# Altium PCB Main.PcbDoc
Units mil, origin at the board's own origin, x right, y up, seen from the top; angles counter-clockwise.
Board outline 2260 x 1190 mil, 4 copper layers (Top Layer, GND 1, GND 2, Bottom Layer), stack 62.449 mil thick; 76 components, 60 nets, 310 pads, 122 vias.
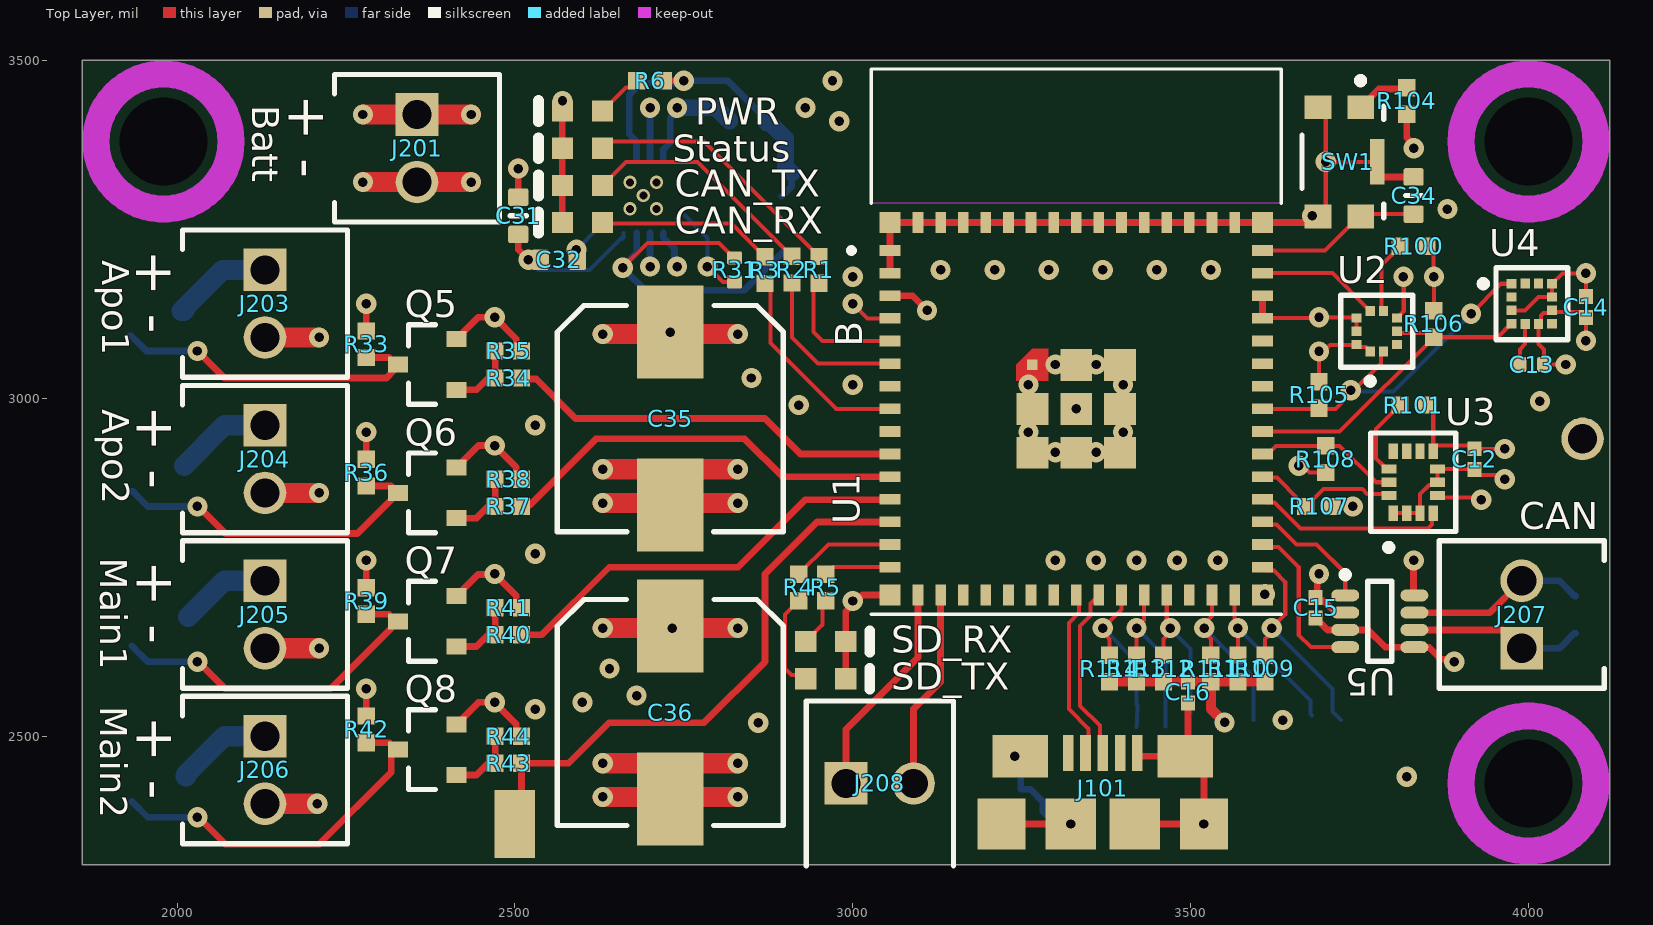
[diagram p0: Top Layer view]
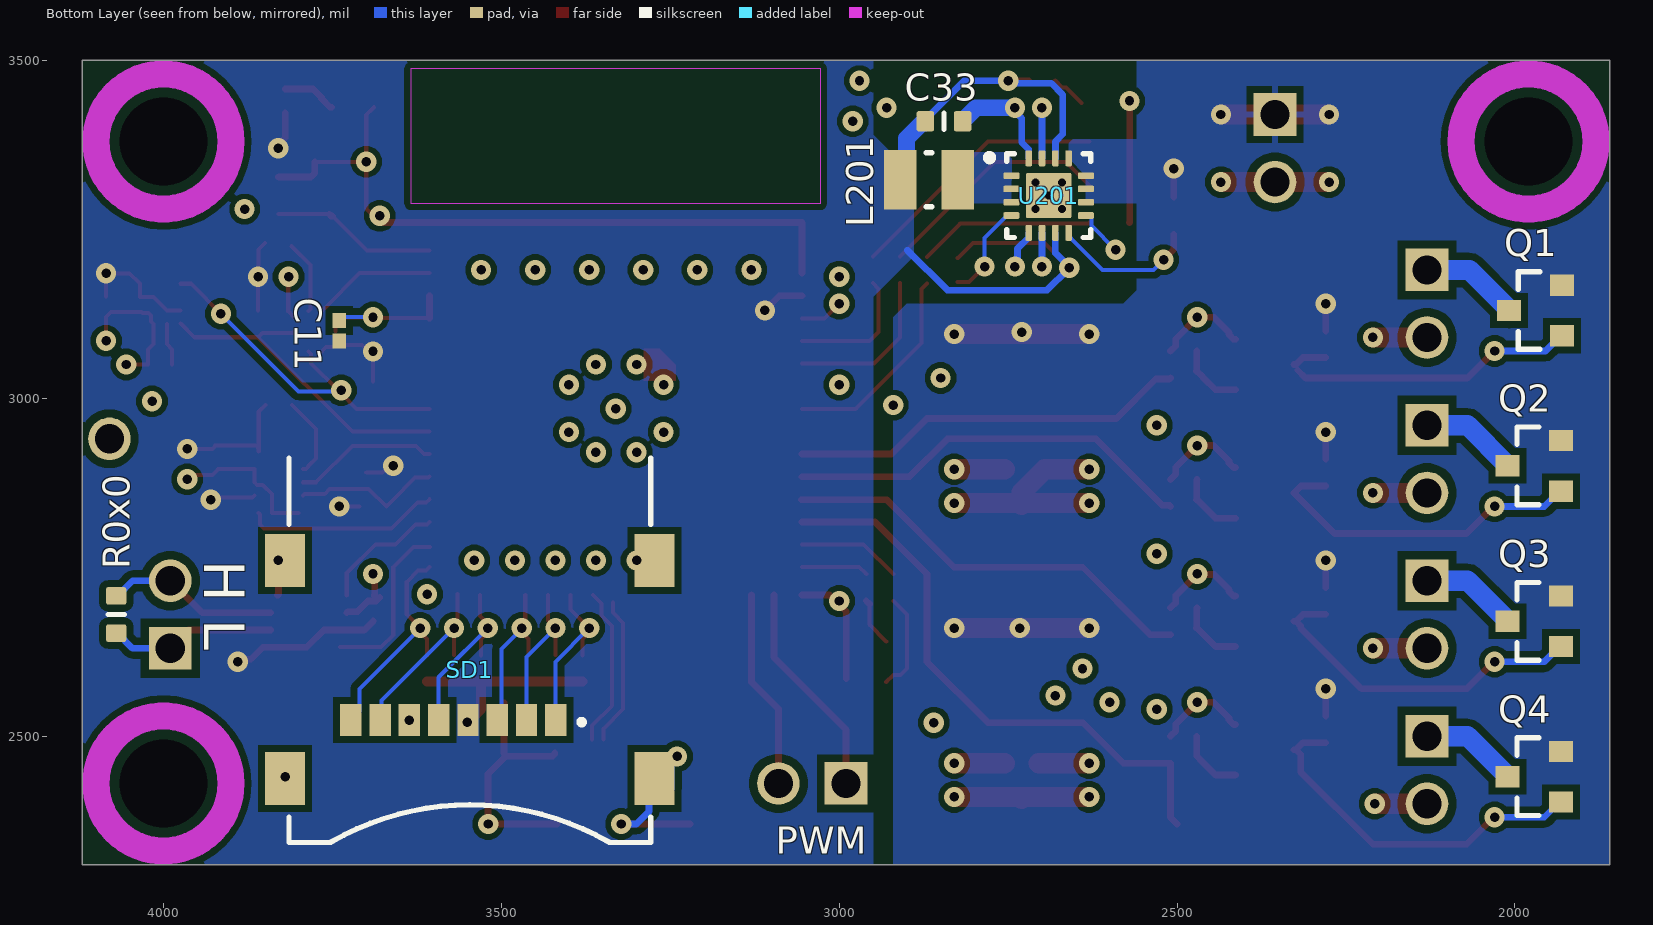
[diagram p1: Bottom Layer view, seen from below]
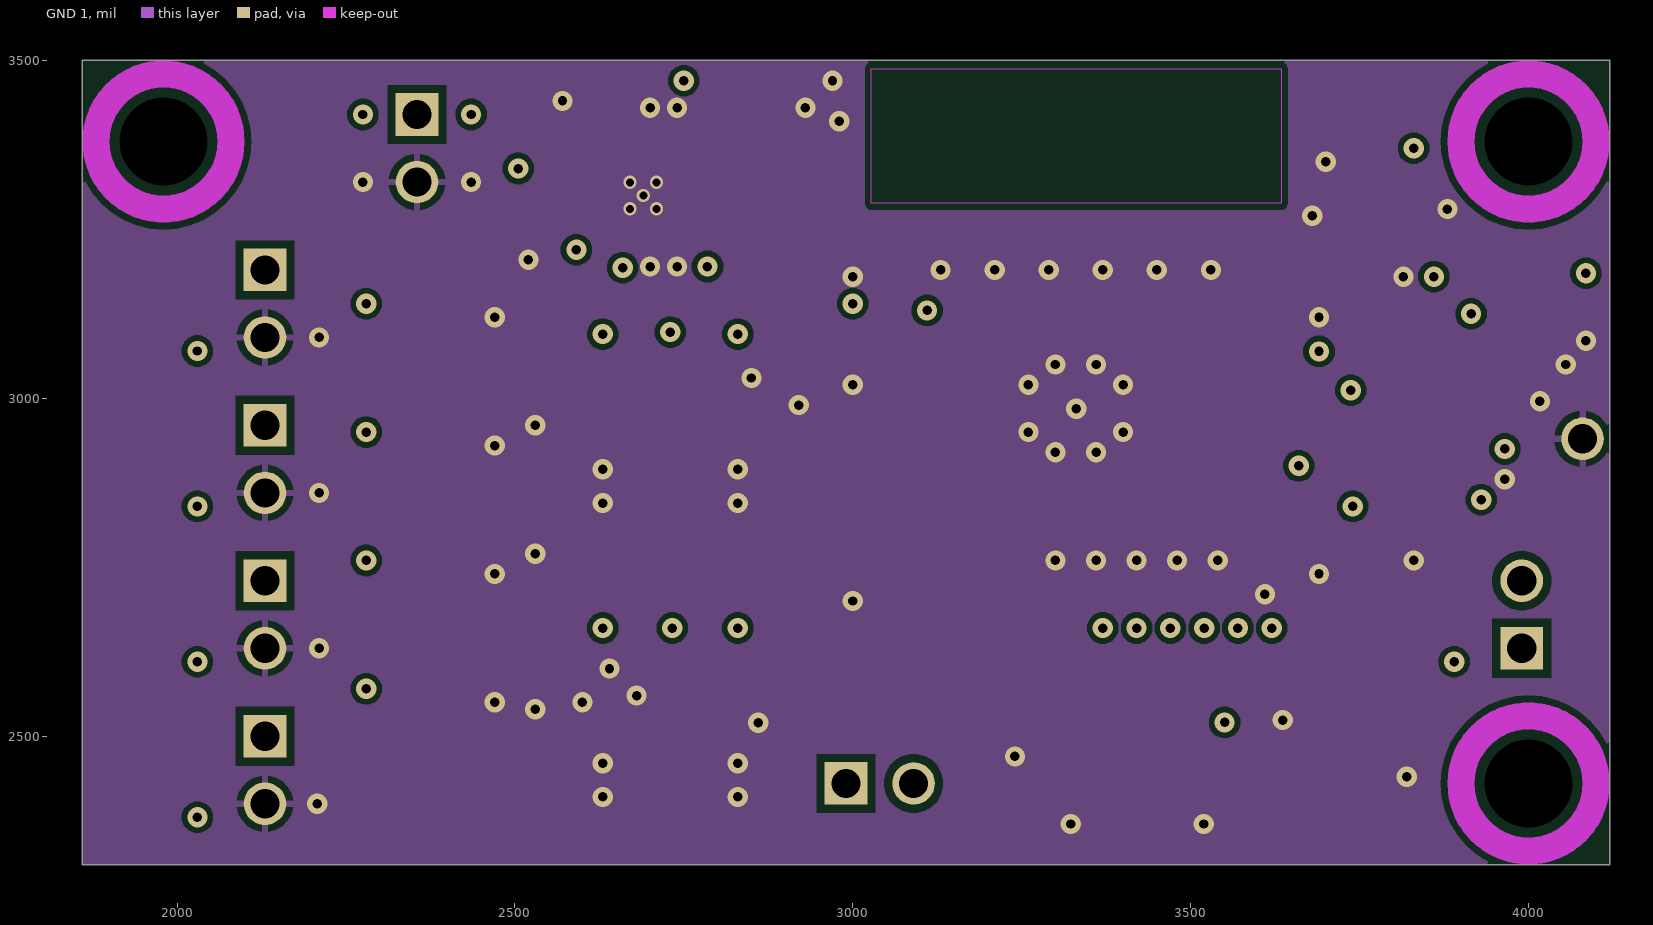
[diagram p2: GND 1]
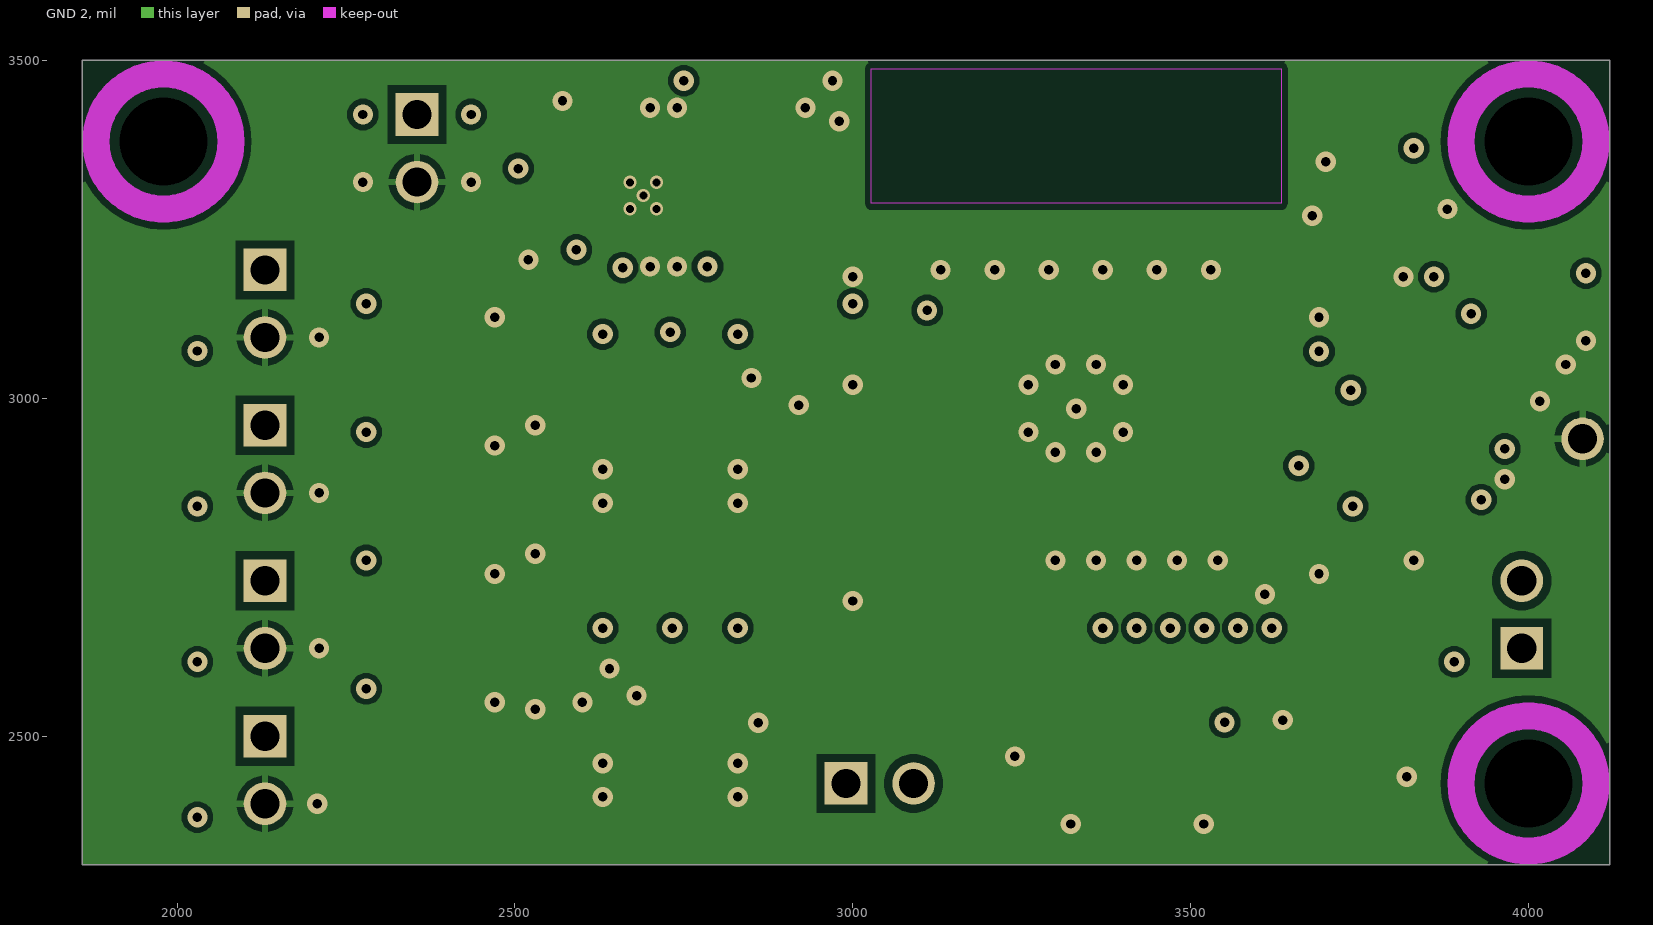
[diagram p3: GND 2]
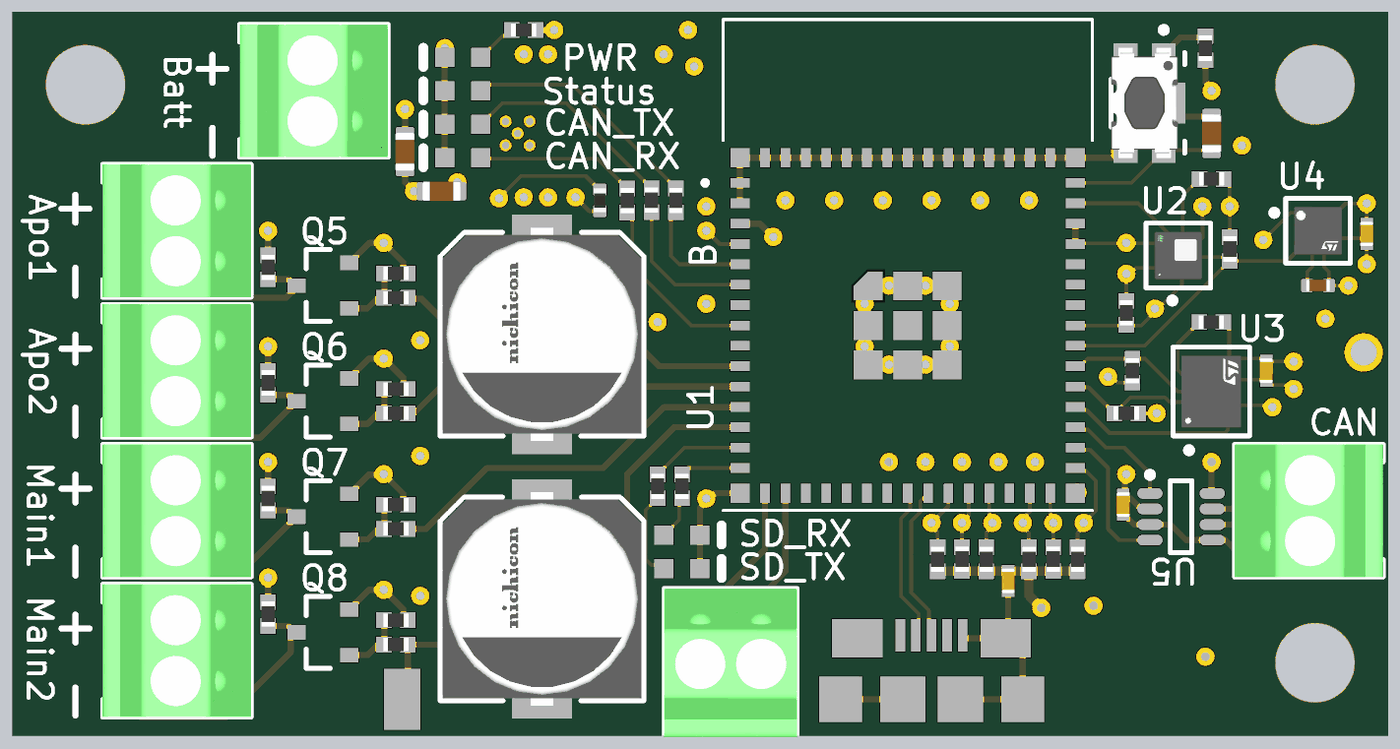
[diagram p4: 3D render of the assembled board from above, using the file's embedded part models]

## Layer stack, top to bottom
Top Solder: solder mask 1.2, Solder Resist, Dk 3.8
Top Layer: signal copper 1.378
Dielectric 2: prepreg 8.284, PP-006, Dk 4.4
GND 1: signal copper 0.598
Dielectric 1: dielectric 41.929, FR-4, Dk 4.6
GND 2: signal copper 0.598
Dielectric 3: prepreg 8.284, PP-006, Dk 4.4
Bottom Layer: signal copper 1.378
Bottom Solder: solder mask 1.2, Solder Resist, Dk 3.8

## Board outline
1860,2310 4120,2310 4120,3500 1860,3500

## Design rules (kind name [scope] priority, off if disabled: settings)
Clearance [All] p1: gap=10 ignorepadtopadclearanceinfootprint=FALSE except(4: Arc-Arc Arc-Track Arc-SMDPad Arc-THPad Track-Track Track-SMDPad Track-THPad SMDPad-SMDPad; 8: Arc-Via Track-Via Via-Fill Via-Poly Via-Region; 10.83: Arc-Hole Track-Hole SMDPad-Hole THPad-Hole Via-Hole Fill-Hole Poly-Hole Region-Hole Text-Hole; 12: THPad-Fill THPad-Poly THPad-Region; 14: SMDPad-THPad THPad-THPad)
HoleSize [IsVia] p1: absolutevalues=TRUE maxlimit=100 minlimit=8 maxpercent=80.000 minpercent=20.000
HoleSize HoleSize_1 [All] p2: absolutevalues=TRUE maxlimit=100 minlimit=11.81 maxpercent=80.000 minpercent=20.000
HoleToHoleClearance [IsVia] p1: gap=7.87 allowstackedmicrovias=FALSE
HoleToHoleClearance HoleToHoleClearance_1 [All] p2: gap=18 allowstackedmicrovias=TRUE
MinimumAnnularRing MinimumAnnularRing_1 [IsVia] p1: minimumring=3.94
MinimumAnnularRing [All] p2: minimumring=7.87
MinimumSolderMaskSliver [All] p1: minsoldermaskwidth=3.94
PolygonConnect [All] p1: thpad.connectstyle=Relief thpad.reliefconductorwidth=10 thpad.reliefentries=4 thpad.polygonreliefangle="90 Angle" thpad.airgapwidth=10 smdpad.connectstyle=Direct smdpad.reliefconductorwidth=10 smdpad.reliefentries=4 smdpad.polygonreliefangle="90 Angle" smdpad.airgapwidth=10 via.connectstyle=Direct via.reliefconductorwidth=10 via.reliefentries=4 via.polygonreliefangle="90 Angle" via.airgapwidth=10
RoutingVias [All] p1: holewidth=10 width=26 viastyle="Through Hole" minholewidth=5.91 minwidth=9.84 maxholewidth=28 maxwidth=50
SilkToSilkClearance [All] p1: silktosilkclearance=4
SilkToSolderMaskClearance [IsPad] p1: minsilkscreentomaskgap=6 clearancetoexposedcopper=TRUE
SolderMaskExpansion [All] p1: expansion=1.5 istentingtop=FALSE
SupplyNets "Schematic Supply Nets_1" [InNet('+5')] p1: voltage=0.000
SupplyNets "Schematic Supply Nets_3" [InNet('+3V3')] p2: voltage=0.000
SupplyNets "Schematic Supply Nets_2" [InNet('GND')] p3: voltage=0.000
SupplyNets "Schematic Supply Nets" [InNet('+Batt')] p4: voltage=0.000
Width [All] p1: maxlimit=60 minlimit=4 preferedwidth=10
25 further rules are at their usual default settings.

## Components (designator, comment, footprint, x,y, rotation, side; value= is the part's Value field where it differs from the comment)
C11 "Capacitor 1 uF +/- 10% 6.3 V 0402" CAPC1005X55X25LL05T10 3740,3100 r270 bottom value=1µF
C12 "Capacitor 1 uF +/- 10% 6.3 V 0402" CAPC1005X55X25LL05T10 3920,2910 r90 top value=1µF
C13 "Capacitor 220nF +/-20% 10V 0402" CAPC0402(1005)60_L 4005,3050 r0 top value=220nF
C14 "Capacitor 1 uF +/- 10% 6.3 V 0402" CAPC1005X55X25LL05T10 4085,3135 r270 top value=1µF
C15 "Capacitor 1 uF +/- 10% 6.3 V 0402" CAPC1005X55X25LL05T10 3685,2690 r90 top value=1µF
C16 "Capacitor 1 uF +/- 10% 6.3 V 0402" CAPC1005X55X25LL05T10 3495.97,2564.64 r90 top value=1µF
C31 "Capacitor 10µF +/-20% 10V 0603" CAPC0603(1608)100_L 2505,3270 r90 top value=10µF
C32 "Capacitor 470pF +/-20% 50V 0402" CAPC0603(1608)100_L 2565,3205 r0 top value=470pF
C33 "Capacitor 10µF +/-20% 10V 0603" CAPC0603(1608)100_L 2845,3410 r0 bottom value=22µF
C34 "Capacitor 10µF +/-20% 10V 0603" CAPC0603(1608)100_L 3830,3300 r270 top value=10µF
C35 "UWT1C471MNL1GS" FP-UWT1C471MNL1GS-MFG 2730,2970 r90 top
C36 "UWT1C471MNL1GS" FP-UWT1C471MNL1GS-MFG 2730,2535 r90 top
CAN_RX "HSMW-C191" AVAG-HSMW-C191_V 2600,3260 r180 top
CAN_TX "HSMW-C191" AVAG-HSMW-C191_V 2600,3315 r180 top
J101 "10118192-0001LF" FCI-10118192-0001LF-5_V 3370,2370 r0 top
J201 "Battery Connector" PHOE-1725656-2 2355.16,3370 r270 top
J203 "1725656" PHOE-1725656-2 2130.16,3140 r270 top
J204 "1725656" PHOE-1725656-2 2130.16,2910 r270 top
J205 "1725656" PHOE-1725656-2 2130.16,2680 r270 top
J206 "1725656" PHOE-1725656-2 2130.16,2450 r270 top
J207 "1725656" PHOE-1725656-2 3990,2680 r90 top
J208 "1725656" PHOE-1725656-2 3040,2430 r0 top
L201 "LQM2HPN2R2MG0L" INDC2520X100X60NL20T20 2867.16,3323.37 r0 bottom value=2.2µH
PWR "HSMW-C191" AVAG-HSMW-C191_V 2600,3425 r180 top
Q1 "NTR4171PT1G" ONSC-SOT-23-3-318-08_V 1969.53,3130 r0 bottom
Q2 "NTR4171PT1G" ONSC-SOT-23-3-318-08_V 1971.5,2900 r0 bottom
Q3 "NTR4171PT1G" ONSC-SOT-23-3-318-08_V 1971.5,2670 r0 bottom
Q4 "NTR4171PT1G" ONSC-SOT-23-3-318-08_V 1971.5,2440 r0 bottom
Q5 "BC849C" INF-SOT23_L 2370.16,3050 r180 top
Q6 "BC849C" INF-SOT23_L 2370.16,2860 r180 top
Q7 "BC849C" INF-SOT23_L 2370.16,2670 r180 top
Q8 "BC849C" INF-SOT23_L 2370.16,2480 r180 top
R0x0 "Resistor 120R +/-5 % 0603 0.1 W" RESC0603(1608)_L 4070,2680 r90 bottom value=120
R1 "Resistor 4k7 +/-1% 0402 63 mW" RESC1005X40X25ML05T05 2950,3190 r90 top value=4.7k
R2 "Resistor 4k7 +/-1% 0402 63 mW" RESC1005X40X25ML05T05 2910,3190.32 r90 top value=4.7k
R3 "Resistor 4k7 +/-1% 0402 63 mW" RESC1005X40X25ML05T05 2870,3189.68 r90 top value=4.7k
R4 "Resistor 4k7 +/-1% 0402 63 mW" RESC1005X40X25ML05T05 2920,2720 r270 top value=4.7k
R5 "Resistor 4k7 +/-1% 0402 63 mW" RESC1005X40X25ML05T05 2960,2720 r270 top value=4.7k
R6 "Resistor 4k7 +/-1% 0402 63 mW" RESC1005X40X25ML05T05 2700,3470 r180 top value=4.7k
R31 "Resistor 100K +/-1 % 0402 63 mW" RESC0402(1005)_L 2825,3190 r90 top value=100k
R33 "Resistor 4k7 +/-1% 0402 63 mW" RESC1005X40X25ML05T05 2280,3080 r270 top value=4.7k
R34 "Resistor 4k7 +/-1% 0402 63 mW" RESC1005X40X25ML05T05 2490,3030 r180 top value=4.7k
R35 "Resistor 10k +/-1% 0402 63 mW" RESC1005X40X25ML05T05 2490,3070 r0 top value=10k
R36 "Resistor 4k7 +/-1% 0402 63 mW" RESC1005X40X25ML05T05 2280,2890 r270 top value=4.7k
R37 "Resistor 4k7 +/-1% 0402 63 mW" RESC1005X40X25ML05T05 2490,2840 r180 top value=4.7k
R38 "Resistor 10k +/-1% 0402 63 mW" RESC1005X40X25ML05T05 2490,2880 r0 top value=10k
R39 "Resistor 4k7 +/-1% 0402 63 mW" RESC1005X40X25ML05T05 2280,2700 r270 top value=4.7k
R40 "Resistor 4k7 +/-1% 0402 63 mW" RESC1005X40X25ML05T05 2490,2650 r180 top value=4.7k
R41 "Resistor 10k +/-1% 0402 63 mW" RESC1005X40X25ML05T05 2490,2690 r0 top value=10k
R42 "Resistor 4k7 +/-1% 0402 63 mW" RESC1005X40X25ML05T05 2280,2510 r270 top value=4.7k
R43 "Resistor 4k7 +/-1% 0402 63 mW" RESC1005X40X25ML05T05 2490,2460 r180 top value=4.7k
R44 "Resistor 10k +/-1% 0402 63 mW" RESC1005X40X25ML05T05 2490,2500 r0 top value=10k
R100 "Resistor 10k +/-1% 0402 63 mW" RESC1005X40X25ML05T05 3830,3225 r180 top value=10k
R101 "Resistor 10k +/-1% 0402 63 mW" RESC1005X40X25ML05T05 3829.69,2990 r180 top value=10k
R104 "Resistor 10k +/-1% 0402 63 mW" RESC1005X40X25ML05T05 3820,3440 r90 top value=10k
R105 "Resistor 4k7 +/-1% 0402 63 mW" RESC1005X40X25ML05T05 3690,3005 r270 top value=4.7k
R106 "Resistor 4k7 +/-1% 0402 63 mW" RESC1005X40X25ML05T05 3860,3110 r270 top value=4.7k
R107 "Resistor 4k7 +/-1% 0402 63 mW" RESC1005X40X25ML05T05 3690,2840 r180 top value=4.7k
R108 "Resistor 4k7 +/-1% 0402 63 mW" RESC1005X40X25ML05T05 3700,2910 r90 top value=4.7k
R109 "Resistor 10k +/-1% 0402 63 mW" RESC1005X40X25ML05T05 3610,2600 r90 top value=10k
R110 "Resistor 10k +/-1% 0402 63 mW" RESC1005X40X25ML05T05 3570,2600.31 r90 top value=10k
R111 "Resistor 10k +/-1% 0402 63 mW" RESC1005X40X25ML05T05 3530,2600 r90 top value=10k
R112 "Resistor 10k +/-1% 0402 63 mW" RESC1005X40X25ML05T05 3460,2600 r90 top value=10k
R113 "Resistor 10k +/-1% 0402 63 mW" RESC1005X40X25ML05T05 3420,2600.31 r90 top value=10k
R114 "Resistor 10k +/-1% 0402 63 mW" RESC1005X40X25ML05T05 3380,2600 r90 top value=10k
SD1 "MEM2067-02-180-00-A" MEM2067-02-180-00-A_REVB 3546.57,2627.13 r180 bottom
SD_RX "HSMW-C191" AVAG-HSMW-C191_V 2960,2640 r0 top
SD_TX "HSMW-C191" AVAG-HSMW-C191_V 2960,2585 r0 top
Status "HSMW-C191" AVAG-HSMW-C191_V 2600,3370 r180 top
SW1 "KMR231GLFS" FP-KMR231GLFS-MFG 3720,3350 r270 top
U1 "ESP32-S3-MINI-1-N8" XCVR_ESP32-S3-MINI-1-N8 3330.79,2984.41 r0 top
U2 "LPS22HHTR" FP-HLGA-10L-DM00386636-MFG 3775.45,3099.23 r90 top
U3 "LSM6DSRTR" FP-LGA-14L-DM00249496-MFG 3829.53,2875.77 r90 top
U4 "IIS2MDCTR" FP-LGA-12-DM00170568-MFG 4005,3140 r0 top
U5 "TCAN3413DDFR" TSOP65P280X110-8N 3780,2670 r0 top
U201 "TPS62142RGTT" RGT0016C_V 2690,3300 r180 bottom

## Footprints (in the part's own frame and the unit in brackets; to place one, negate y for a bottom-side part, rotate by r counter-clockwise, add the part's x,y. Pads: shape width x height; smd on the part's side, far side on the other; paste and mask are expansions set on the pad)
AVAG-HSMW-C191_V [mm] "SMD, 2-Leads, Body 1.6x0.8mm"
  rect 0.8x0.8 smd: 1(-0.75,0) 2(0.75,0)
  silkscreen extent 1.65,-0.4 1.65,0.4, body extent -0.8,-0.4 0.8,0.4, height 0.7
CAPC0402(1005)60_L [mm] "Chip Capacitor, Body 1.0x0.5mm, Height 0.6mm, IPC High Density"
  rrect25% 0.5x0.55 smd: 1(-0.45,0) 2(0.45,0)
  body extent -0.5,-0.25 0.5,0.25, height 0.6
CAPC0603(1608)100_L [mm] "Chip Capacitor, Body 1.6x0.8mm, Height 1.0mm, IPC High Density"
  rrect25% 0.66x0.76 smd: 1(-0.7,0) 2(0.7,0)
  silkscreen extent 0,-0.3 0,0.3, body extent -0.8,-0.4 0.8,0.4, height 0.95
CAPC1005X55X25LL05T10 [mm] "Chip Capacitor, 2-Leads, Body 1.05x0.55mm, IPC High Density"
  rect 0.56x0.52 smd: 1(-0.39,0) 2(0.39,0)
  body extent -0.53,-0.28 0.53,0.28, height 0.55
FCI-10118192-0001LF-5_V [mm] "SMD, 5-Leads, Body 8.05x5.77mm, Pitch 0.65mm"
  rect 0.4x1.35 smd: 1(-1.3,2.675) 2(-0.65,2.675) 3(0,2.675) 4(0.65,2.675) 5(1.3,2.675)
  rect 2.1x1.6 smd: 6(-3.1,2.55) 7(3.1,2.55)
  rect 1.8x1.9 smd: 8(-3.8,0) 9(3.8,0)
  rect 1.9x1.9 smd: 10(-1.2,0) 11(1.2,0)
  body extent -4.03,-2.67 4.03,3.1, height 2.7
FP-HLGA-10L-DM00386636-MFG [mm]
  rect 0.375x0.35 smd paste+0 mask+0: 1(-0.763,0.25) 2(-0.763,-0.25) 6(0.763,-0.25) 7(0.763,0.25)
  rect 0.35x0.375 smd paste+0 mask+0: 3(-0.5,-0.763) 4(0,-0.763) 5(0.5,-0.763) 8(0.5,0.763) 9(0,0.763) 10(-0.5,0.763)
  silkscreen extent -2,-1.35 1.35,1.35, body extent -1.55,-1.55 1.55,1.55, height 0.25
FP-KMR231GLFS-MFG [mm]
  rect 0.9x1 smd paste+0 mask+0: 1(-2.05,0.8) 2(2.05,0.8) 3(-2.05,-0.8) 4(2.05,-0.8)
  rect 1.7x0.55 smd paste+0 mask+0: 5(0,1.425)
  silkscreen extent -3.17,-1.4 2.1,1.68, body extent -2.6,-1.5 2.6,1.8, height 0.25
FP-LGA-12-DM00170568-MFG [mm]
  rect 0.375x0.35 smd paste-1000 mask+0: 1(-0.763,0.75) 2(-0.763,0.25) 3(-0.763,-0.25) 4(-0.763,-0.75) 7(0.763,-0.75) 8(0.763,-0.25) 9(0.763,0.25) 10(0.763,0.75)
  rect 0.35x0.375 smd paste-1000 mask+0: 5(-0.25,-0.763) 6(0.25,-0.763) 11(0.25,0.763) 12(-0.25,0.763)
  silkscreen extent -1.95,-1.35 1.35,1.35, body extent -1.55,-1.55 1.55,1.55, height 0.25
FP-LGA-14L-DM00249496-MFG [mm]
  rect 0.575x0.35 smd paste-1000 mask+0: 1(-1.162,0.75) 2(-1.162,0.25) 3(-1.162,-0.25) 4(-1.162,-0.75) 8(1.162,-0.75) 9(1.162,-0.25) 10(1.162,0.25) 11(1.162,0.75)
  rect 0.35x0.575 smd paste-1000 mask+0: 5(-0.5,-0.913) 6(0,-0.913) 7(0.5,-0.913) 12(0.5,0.913) 13(0,0.913) 14(-0.5,0.913)
  silkscreen extent -2.57,-1.6 1.85,1.6, body extent -2.05,-1.8 2.05,1.8, height 0.25
FP-UWT1C471MNL1GS-MFG [mm]
  rect 3.5x2.5 smd paste+0 mask+0: 1(-3.25,0) 2(3.25,0)
  silkscreen extent -4.25,-4.25 4.25,4.25, body extent -5.25,-4.5 5.25,4.5, height 0.25
INDC2520X100X60NL20T20 [mm] "Chip Inductor, 2-Leads, Body 2.7x2.2mm, IPC Medium Density"
  rect 1.23x2.22 smd: 1(-1.085,0) 2(1.085,0)
  silkscreen extent -0.1,-1.01 0.1,1.01, body extent -1.35,-1.1 1.35,1.1, height 1
INF-SOT23_L [mm] "SOT23, 3-Leads, Body 2.9x1.3 mm, Pitch 0.95 mm, IPC High Density"
  rect 0.75x0.6 smd: 1(-1.1,0.95) 2(-1.1,-0.95) 3(1.1,0)
  silkscreen extent -0.3,-1.5 0.7,1.5, body extent -0.7,-1.5 0.7,1.5, height 1.1
MEM2067-02-180-00-A_REVB [mm]
  rect 0.8x1.2 smd: 1(3.225,-2.625) 2(2.125,-2.625) 3(1.025,-2.625) 4(-0.075,-2.625) 5(-1.175,-2.625) 6(-2.275,-2.625) 7(-3.375,-2.625) 8(-4.475,-2.625)
  rect 1.5x2 smd: 9(-6.945,-4.825) 10(-6.945,3.375) 11(6.945,3.375) 12(6.945,-4.825)
  silkscreen extent -6.8,-7.22 6.8,7.22
ONSC-SOT-23-3-318-08_V [mm] "SOT23, 3-Leads, Body 2.92x1.3mm, Pitch 0.95mm"
  rect 0.9x0.8 smd: 1(-1,0.95) 2(-1,-0.95) 3(1,0)
  silkscreen extent -0.17,-1.46 0.65,1.46, body extent -0.65,-1.46 0.65,1.46, height 1.11
PHOE-1725656-2 [mm] "Connector, 2-Leads, Body 6.2x5.4mm, Pitch 2.54mm"
  rect 1.6x1.6 hole 1.1: 1(-1.27,0)
  round 1.6 hole 1.1: 2(1.27,0)
  silkscreen extent -2.77,-3.1 2.77,3.1, body extent -2.77,-3.1 2.77,3.1, height 9
RESC0402(1005)_L [mm] "Chip Resistor, Body 1.0x0.5mm, IPC High Density"
  rrect25% 0.5x0.55 smd: 1(-0.45,0) 2(0.45,0)
  body extent -0.5,-0.25 0.5,0.25, height 0.3
RESC0603(1608)_L [mm] "Chip Resistor, Body 1.6x0.8mm, IPC High Density"
  rrect25% 0.66x0.76 smd: 1(-0.7,0) 2(0.7,0)
  silkscreen extent 0,-0.3 0,0.3, body extent -0.8,-0.4 0.8,0.4, height 0.45
RESC1005X40X25ML05T05 [mm] "Chip Resistor, 2-Leads, Body 1.05x0.55mm, IPC Low Density"
  rect 0.65x0.65 smd: 1(-0.5,0) 2(0.5,0)
  body extent -0.53,-0.28 0.53,0.28, height 0.4
RGT0016C_V [mm] "QFN, 16-Leads, Body 3x3mm, Pitch 0.5mm, Thermal Pad 1.65x1.65mm"
  rrect40% 0.6x0.25 smd: 1(-1.4,0.75) 2(-1.4,0.25) 3(-1.4,-0.25) 4(-1.4,-0.75) 9(1.4,-0.75) 10(1.4,-0.25) 11(1.4,0.25) 12(1.4,0.75)
  rrect40% 0.25x0.6 smd: 5(-0.75,-1.4) 6(-0.25,-1.4) 7(0.25,-1.4) 8(0.75,-1.4) 13(0.75,1.4) 14(0.25,1.4) 15(-0.25,1.4) 16(-0.75,1.4)
  rrect6% 1.55x1.55 on Bottom Paste: 17(0,0)
  rrect6% 1.7x1.7 smd paste-0.85: 17(0,0)
  silkscreen extent -2.35,-1.57 1.57,1.58, body extent -1.5,-1.5 1.5,1.5, height 1
TSOP65P280X110-8N [mm] "TSOP, 8-Leads, Body 2.90x1.60mm, Pitch 0.65mm, IPC Medium Density"
  oval 1.05x0.45 smd: 1(-1.3,0.975) 2(-1.3,0.325) 3(-1.3,-0.325) 4(-1.3,-0.975) 5(1.3,-0.975) 6(1.3,-0.325) 7(1.3,0.325) 8(1.3,0.975)
  silkscreen extent -1.42,-1.5 0.45,1.87, body extent -0.85,-1.5 0.85,1.5, height 1.1
XCVR_ESP32-S3-MINI-1-N8 [mm]
  rect 0.8x0.4 smd: 1(-7,5.95) 2(-7,5.1) 3(-7,4.25) 4(-7,3.4) 5(-7,2.55) 6(-7,1.7) 7(-7,0.85) 8(-7,0) 9(-7,-0.85) 10(-7,-1.7) 11(-7,-2.55) 12(-7,-3.4) 13(-7,-4.25) 14(-7,-5.1) 15(-7,-5.95) 31(7,-5.95) 32(7,-5.1) 33(7,-4.25) 34(7,-3.4) 35(7,-2.55) 36(7,-1.7) 37(7,-0.85) 38(7,0) 39(7,0.85) 40(7,1.7) 41(7,2.55) 42(7,3.4) 43(7,4.25) 44(7,5.1) 45(7,5.95)
  rect 0.4x0.8 smd: 16(-5.95,-7) 17(-5.1,-7) 18(-4.25,-7) 19(-3.4,-7) 20(-2.55,-7) 21(-1.7,-7) 22(-0.85,-7) 23(0,-7) 24(0.85,-7) 25(1.7,-7) 26(2.55,-7) 27(3.4,-7) 28(4.25,-7) 29(5.1,-7) 30(5.95,-7) 46(5.95,7) 47(5.1,7) 48(4.25,7) 49(3.4,7) 50(2.55,7) 51(1.7,7) 52(0.85,7) 53(0,7) 54(-0.85,7) 55(-1.7,7) 56(-2.55,7) 57(-3.4,7) 58(-4.25,7) 59(-5.1,7) 60(-5.95,7)
  rect 1.2x1.2 smd: 61(0,0) 61_2(0,1.65) 61_3(1.65,1.65) 61_4(1.65,0) 61_5(1.65,-1.65) 61_6(0,-1.65) 61_7(-1.65,-1.65) 61_8(-1.65,0)
  rect 0.4x0.4 smd paste-1 mask+0: 61_1(-1.65,1.65)
  rect 0.8x0.8 smd: 62(-7,7) 63(-7,-7) 64(7,-7) 65(7,7)
  Top Layer region: -1.05,1.05 -2.25,1.05 -2.25,1.65 -1.65,2.25 -1.05,2.25
  Keep-Out Layer region: 7.7,7.725 -7.7,7.725 -7.7,12.775 7.7,12.775
  Keep-Out Layer region: 7.7,7.725 -7.7,7.725 -7.7,12.775 7.7,12.775
  silkscreen extent -8.55,-7.73 7.7,12.78

## Part data
C11 C12 C14 C15 C16: library part CMP-001-00008-6, "Chip Capacitor, 1 uF, +/- 10%, 6.3 V, 0402 (1005 Metric)", Capacitor Type=Ceramic, Case/Package=0402, Max Operating Temperature=85°C, Min Operating Temperature=-55°C, Tolerance=10%, Voltage Rating=6.3V, Mounting Technology=SM, Pins=2, RoHS Compliant=True
C13: library part CMP-001-00057-3, "Chip Capacitor, 220nF +/-20%, 10V, 0402, Thickness 0.6 mm", Case/Package=0402, Max Operating Temperature=85°C, Min Operating Temperature=-55°C, Tolerance=10%, Voltage Rating=10V, Mounting Technology=SMT, Pins=2
C31 C33 C34: library part CMP-001-00075-4, "Chip Capacitor, 10µF +/-20%, 10V, 0603, Thickness 1 mm", Case/Package=0603, Max Operating Temperature=85°C, Min Operating Temperature=-55°C, Tolerance=10%, Voltage Rating=10V, Mounting Technology=SMT, Pins=2
C32: library part CMP-001-00075-4, "Chip Capacitor, 470pF +/-20%, 10V, 0603, Thickness 1 mm", Case/Package=0603, Max Operating Temperature=85°C, Min Operating Temperature=-55°C, Tolerance=10%, Voltage Rating=10V, Mounting Technology=SMT, Pins=2
C35 C36: library part CMP-12462-000039-1, "CAP ALUM 470UF 20% 16V SMD", Capacitance=470uF, Case/Package=Radial, Dielectric Material=Aluminium, Leakage Current=3uA, Max Operating Temperature=105°C, Min Operating Temperature=-55°C, Package Quantity=1, Ripple Current=230mA, Tolerance=20%, Voltage=16V, Construction=Cylindrical, Diameter=8mm, Dissipation Factor=0.2%, Height=10mm, Height - Seated (Max)=0.394inch, Lead Free="Lead Free", Length=10mm, Life (Hours)=1000Hour, Mount="Surface Mount", Number of Pins=2, Packaging="Tape and Reel", Radiation Hardening=No, REACH SVHC="No SVHC", Ripple Current (AC)=230mA, RoHS Compliant=Yes, Series=WT, Termination=SMD/SMT, Voltage Rating=16V, Voltage Rating (DC)=16V
CAN_RX CAN_TX PWR SD_RX SD_TX Status: library part CMP-007-00016-2, "LED Uni-Color White, 78 mW, 20 mA, -40 to 85 degC, 2-Pin SMD, RoHS, Tape and Reel", Case/Package=0603, Colour=White, Forward Current=20mA, Forward Voltage=3.6V, Manufacturer=Avago, Max Operating Temperature=85°C, Min Operating Temperature=-40°C, Package Description="2-Pin Surface Mount Device, Body 1.6 x 0.8 mm", Package Quantity=4000, Power=78mW, Datasheet URL=http://docs.avagotech.com/docs/AV02-0186EN, Datasheet Version=May-10, Illumination Colour=White, Lens Style=Diffused, Luminous Intensity=200mcd, Manufacturer URL=http://www.avagotech.com/, Mounting Technology=SM, Nominal Vf=3.6V, Package Reference=HSMW-C191, Packaging=TapeandReel, Pins=2, RoHS Compliant=True, Viewing Angle=140degrees
J101: library part CMP-2000-05118-1, "Micro USB B Type Receptacle, -55 to 85 degC, 5-Pin SMD, RoHS, Tape and Reel", Color=Black, Current Rating=1.8A, Flammability Rating=UL94V-0, Insulation Resistance=1000MOhms, Manufacturer=FCI, Operating Temperature Range=-55Cto+85C, Brand=FCI, Connector Type=MicroUSBTypeBreceptacle, Contact Material=CopperAlloy, Contact Plating=Gold, Datasheet URL=http://www.mouser.com/ds/2/154/10118192-793027.pdf, Datasheet Version="Rev. B, 05/2015", Factory Pack Quantity=1400, Gender=Female, Manufacturer URL=http://www.fci.com/, Mounting Angle=Right, Number of Contacts=5Contact, Packaging=Reel, Product=MicroUSBTypeBConnectors, Product Category=USBConnectors, RoHS=Details, Standard=USB2.0, Termination Style=SMD/SMT
J201: library part CMP-2000-05299-1, "Male Header, Pitch 2.54 mm, 1 x 2 Position, Height 9 mm, Tail Length 3.5 mm", Colour=Green, Manufacturer="Phoenix Contact", Manufacturer part No.=1725656, Content=250pc(s), Datasheet URL=http://datasheet.octopart.com/1725656-Phoenix-Contact-datasheet-5302866.pdf, Datasheet Version=Apr-08, Industrial packaging=Yes, Manufacturer URL=http://www.phoenixcontact.com/, Number of Contacts=2, Pitch=2.54mm, Type=MPT0,5/2-2,54
J203 J204 J205 J206 J207 J208: library part CMP-2000-05299-1, "Male Header, Pitch 2.54 mm, 1 x 2 Position, Height 9 mm, Tail Length 3.5 mm", Colour=Green, Manufacturer="Phoenix Contact", Content=250pc(s), Datasheet URL=http://datasheet.octopart.com/1725656-Phoenix-Contact-datasheet-5302866.pdf, Datasheet Version=Apr-08, Industrial packaging=Yes, Manufacturer part No.=1725656, Manufacturer URL=http://www.phoenixcontact.com/, Number of Contacts=2, Pitch=2.54mm, Type=MPT0,5/2-2,54
L201: library part CMP-006-00009-6, "Chip Inductor, 2.2 uH, +/- 20%, -55 to 125 degC, 1008 (2520 Metric), RoHS, Tape and Reel", Case/Package=1008, Current Rating=1.3A, Manufacturer=Murata, Max Operating Temperature=125°C, Min Operating Temperature=-55°C, Package Description="2-Pin Surface Mounted Device, Body 2.5 x 2 mm", Package Quantity=3000, Self Resonant Frequency=40MHz, Tolerance=20%, Core Material=Ferrite, Datasheet URL=http://psearch.en.murata.com/inductor/product/LQM2HPN2R2MG0%23.pdf, Datasheet Version=Aug-16, Mounting Technology=SM, Package Reference=1008, Packaging=TapeandReel, RoHS Compliant=True, Shielding=Shielded
Q1 Q2 Q3 Q4: library part CMP-1058-00738-1, "Power MOSFET, -30 V, 3.5 A, Single P-Channel, 3-Pin SOT-23, Pb-Free, Tape and Reel", Manufacturer="On Semiconductor", Package Type=SOT-23-3, Channel Polarity="P Channel", Ciss Typ (pF)=720, ComponentLink1Description="Manufacturer URL", ComponentLink1URL=http://www.onsemi.com/, ComponentLink2Description=Datasheet, ComponentLink2URL=http://www.onsemi.cn/pub_link/Collateral/NTR4171P-D.PDF, ComponentLink3Description="Package Specification", ComponentLink3URL=http://www.onsemi.cn/pub_link/Collateral/318-08.PDF, Configuration=Single, Coss Typ (pF)=95, Crss Typ (pF)=65, DatasheetVersion="Rev. 1", Mounting Technology="Surface Mount", PackageDescription="3-Pin Small Outline Transistor, Body 2.92 x 1.3 mm, Pitch 0.95 mm", PackageReference=SOT-23-3-318-08, PackageVersion="Rev. AP, 11/2009", Packing="Tape and Reel", PartNumber=NTR4171PT1G, Qrr Typ (nC)=8, RoHS=Pb-Free, V(BR)DSS Min (V)=30, VGS Max (V)=12, VGS(th) Max (V)=1.4
Q5 Q6 Q7 Q8: library part CMP-1177-00028-1, "NPN Silicon AF Transistor, 30 V VCEO, 100 mA IC, SOT23, Reel, Green", Manufacturer=Infineon, ComponentLink1Description="Manufacturer URL", ComponentLink1URL=http://www.infineon.com/, ComponentLink2Description=Datasheet, ComponentLink2URL=http://www.infineon.com/dgdl/bc847series_bc848series_bc849series_bc850series.pdf?folderId=db3a304314dca389011541d30fa21656&fileId=db3a304314dca389011541d4630a1657, ComponentLink3Description="Package Specification", ComponentLink3URL=http://www.infineon.com/dgdl/SOT23-Package_Overview.pdf?folderId=db3a30431936bc4b0119532290053c66&fileId=db3a30431936bc4b0119533468123c85, F (typ)="1.2Â dB", fT (typ)="250Â MHz", Green=TRUE, IBM (max)="200Â mA", IC (max)="100Â mA", ICBO (max)="15Â nA", ICM (max)="200Â mA", Mounting Technology="Surface Mount", PackageDescription="3-Pin Small Outline Transistor Package, 1.3 x 2.9 mm Body, 0.95 mm Pitch", PackageReference=SOT23, PackageVersion=Apr-08, Packing=Reel, PartNumber=BC849C, Polarity=NPN, Ptot (max)="330Â mW", VCBO (max)="30Â V", VCEO (max)="30Â V", VEBO (max)="6Â V"
R0x0: library part CMP-009-00176-3, "Chip Resistor, 120 Ohms, +/-5 %, 0.1 W, -55 to 155 degC, 0603", Case/Package=0603, Max Operating Temperature=155°C, Min Operating Temperature=-55°C, Power=100mW, Tolerance=5%, Pins=2
R1 R2 R3 R4 R5 R6 R33 R34 R36 R37 R39 R40 R42 R43 R105 R106 R107 R108: library part CMP-009-00034-5, "Chip Resistor, 4.7 KOhm, +/- 1%, 63 mW, -55 to 155 degC, 0402 (1005 Metric)", Case/Package=0402, Max Operating Temperature=155°C, Min Operating Temperature=-55°C, Power=63mW, Tolerance=1%, Voltage Rating=50V, Mounting Technology=SM, Pins=2, RoHS Compliant=True
R31: library part CMP-009-00168-3, "Chip Resistor, 100 kOhms, +/-1 %, 63 mW, -55 to 155 degC, 0402", Case/Package=0402, Max Operating Temperature=155°C, Min Operating Temperature=-55°C, Power=63mW, Tolerance=1%, Pins=2
R35 R38 R41 R44 R100 R101 R104 R109 R110 R111 R112 R113 R114: library part CMP-009-00019-5, "Chip Resistor, 10 KOhm, +/- 1%, 63 mW, -55 to 155 degC, 0402 (1005 Metric)", Case/Package=0402, Max Operating Temperature=155°C, Min Operating Temperature=-55°C, Power=63mW, Tolerance=1%, Voltage Rating=50V, Mounting Technology=SM, Pins=2, RoHS Compliant=True
SD1: library part CMP-013-000000-1, "MICRO SD HINGED, SMT, 1.80MM PRO", LCSC#=C5124832, Manufacturer="Global Connector Technology", Category=Connectors, ComponentLink1Description=https://datasheet.ciiva.com:443/pdfs/VipMasterIC/IC/GCTI/GCTI-S-A0009044757/GCTI-S-A0009044757-1.pdf?src-supplier=IHS+Markit, ComponentLink1URL=https://datasheet.ciiva.com:443/pdfs/VipMasterIC/IC/GCTI/GCTI-S-A0009044757/GCTI-S-A0009044757-1.pdf?src-supplier=IHS+Markit, ComponentLink2Description=http://www.farnell.com/datasheets/2342925.pdf?src-supplier=Farnell, ComponentLink2URL=http://www.farnell.com/datasheets/2342925.pdf?src-supplier=Farnell, ComponentLink3Description=http://www.farnell.com/datasheets/1876941.pdf?src-supplier=Farnell, ComponentLink3URL=http://www.farnell.com/datasheets/1876941.pdf?src-supplier=Farnell, ComponentLink4Description=https://datasheet.octopart.com/MEM2067-02-180-00-A-Global-Connector-Technology-datasheet-91940696.pdf?src-supplier=Farnell, ComponentLink4URL=https://datasheet.octopart.com/MEM2067-02-180-00-A-Global-Connector-Technology-datasheet-91940696.pdf?src-supplier=Farnell, ComponentLink5Description=https://gct.co/files/drawings/mem2067.pdf?src-supplier=Digikey, ComponentLink5URL=https://gct.co/files/drawings/mem2067.pdf?src-supplier=Digikey, ComponentLink6Description=http://www.farnell.com/datasheets/1876941.pdf?src-supplier=Element14, ComponentLink6URL=http://www.farnell.com/datasheets/1876941.pdf?src-supplier=Element14, ComponentLink7Description=https://datasheet.octopart.com/MEM2067-02-180-00-A-Global-Connector-Technology-datasheet-36736608.pdf?src-supplier=Element14, ComponentLink7URL=https://datasheet.octopart.com/MEM2067-02-180-00-A-Global-Connector-Technology-datasheet-36736608.pdf?src-supplier=Element14, ComponentLink8Description=https://datasheet.octopart.com/MEM2067-02-180-00-A-Global-Connector-Technology-datasheet-77992480.pdf?src-supplier=Future+Electronics, ComponentLink8URL=https://datasheet.octopart.com/MEM2067-02-180-00-A-Global-Connector-Technology-datasheet-77992480.pdf?src-supplier=Future+Electronics, ComponentLink9Description=https://datasheet.octopart.com/MEM2067-02-180-00-A-Global-Connector-Technology-datasheet-91940696.pdf?src-supplier=TME, ComponentLink9URL=https://datasheet.octopart.com/MEM2067-02-180-00-A-Global-Connector-Technology-datasheet-91940696.pdf?src-supplier=TME, Connector Type=PCB, Contact Finish - Mating="GOLD FLASH OVER NICKEL (50)", Contact Finish - Termination="Tin (Sn) - with Nickel (Ni) barrier", Contact Material="Copper Alloy", Design Item ID=MEM2067-02-180-00-A, JESD-609 Code=e3, Manufacturer Part Number=MEM2067-02-180-00-A, Pricing="1=1.41, 10=1.075, 25=0.9668, 50=0.8934, 100=0.8263, 250=0.74696, 500=0.6933 (USD)", Reach SVHC Compliant=Yes, RoHS=Yes, RoHS Compliant=Yes, Source=fc_2025.SchLib, Stock=6262
SW1: library part CMP-2000-06516-3, "SWITCH TACTILE SPST-NO 0.05A 32V", Case/Package=SMD/SMT, Contact Current Rating=50mA, Contact Resistance=100mR, Insulation Resistance=1GR, Max Operating Temperature=85°C, Max Voltage Rating (DC)=32V, Min Operating Temperature=-40°C, Operating Force=3N, Package Quantity=7000, Power Rating=1W, Actuator Length=0.5mm, Actuator Type=Standard, Contact Material=Silver, Contact Plating=Silver, Current Rating=50mA, Depth=4.6mm, Illumination Type=Non-Illuminated, Lead Free="Lead Free", Length=4.6mm, Max Current Rating=50mA, Mechanical Life=150000Cycles, Mount="Surface Mount", Orientation=Straight, Packaging="Cut Tape", Radiation Hardening=No, REACH SVHC="No SVHC", Series=KMR2, Switch Function=Off-Mom, Switch Travel=0.25mm, Termination="Gull Wing", Throw Configuration=SPST, Voltage Rating (DC)=32V, Width=2.8mm
U1: library part CMP-020-00024-1, Case/Package=None, Availability=Unavailable, Component Type=Standard, Design Item ID=ESP32-S3-MINI-1-N8, MF="{'manufacturer': u'Espressif Systems'}", MP=ESP32-S3-MINI-1-N8, Pins=73, Price=None, Source=ESP32-S3-MINI-1-N8.SchLib
U2: library part CMP-12182-000001-1, "CONSUMER MEMS", Manufacturer=STMicroelectronics, Max Supply Voltage=3.7V, Min Supply Voltage=1.7V, Operating Supply Current=4-12uA, Package=HLGA-10L-DM00386636, Temperature="-40°C to +85°C", Temperature Range High=+85°C, Temperature Range Low=-40°C, Automotive=No, Category=IC, ComponentLink2Description=Datasheet, ComponentLink2URL=https://www.st.com/resource/en/datasheet/lps22hh.pdf, Device Class L1=Sensors, Device Class L2="Pressure Sensors", Device Class L3=unset, Digikey Description="CONSUMER MEMS", Footprint Url=https://www.st.com/content/ccc/resource/technical/document/technical_note/73/17/9c/16/dd/96/4a/01/CD00134799.pdf/files/CD00134799.pdf/jcr:content/translations/en.CD00134799.pdf, Height=0.8mm, Lead Free=Yes, Manufacturer Part Number=LPS22HHTR, Octopart=https://octopart.com/lps22hhtr-stmicroelectronics-94834025, Port Style="No Port", RoHS=TRUE, Sensor Output=I2C,SPI
U3: library part CMP-12177-000003-1, "INEMO INERTIAL MODULE: 3D ACCELE", Manufacturer=STMicroelectronics, Max Supply Voltage=3.6V, Min Supply Voltage=1.62V, Operating Supply Current=360-1200uA, Package=LGA-14L-DM00249496, Temperature="-40°C to +85°C", Temperature Range High=+85°C, Temperature Range Low=-40°C, Accel Range=2/4/8/16g, Automotive=No, Category=IC, ComponentLink2Description=Datasheet, ComponentLink2URL=https://www.st.com/resource/en/datasheet/lsm6dsr.pdf, Device Class L1=Sensors, Device Class L2="Motion Sensors", Device Class L3="Inertial Measurement Units (IMUs)", Digikey Description="INEMO INERTIAL MODULE: 3D ACCELE", Footprint Url=https://www.st.com/content/ccc/resource/technical/document/technical_note/73/17/9c/16/dd/96/4a/01/CD00134799.pdf/files/CD00134799.pdf/jcr:content/translations/en.CD00134799.pdf, Gyro Range=125/250/500/1000/2000/4000°/s, Height=0.86mm, Lead Free=Yes, Manufacturer Part Number=LSM6DSRTR, Mouser Description="In a Pack of 2, LSM6DSRTR STMicroelectronics, 3-Axis Accelerometer, Gyroscope, 14-Pin LGA", Octopart=https://octopart.com/lsm6dsrtr-stmicroelectronics-93180177, RoHS=TRUE, Sensor Output=I2C,SPI, Sensor Type=Temperature,Accelerometer,Gyroscope
U4: library part CMP-12173-000003-1, "SENSOR MR I2C/SPI 12LGA", Case/Package=LGA, Max Operating Temperature=85°C, Min Operating Temperature=-40°C, Axis="X, Y, Z", Number of Pins=12, Output Type=SPI, Packaging="Cut Tape", Resolution=16b, RoHS Compliant=Yes, Sensing Method=Magnetoresistive
U5: library part CMP-015-00008-1, "3.3-V CAN FD transceiver with flexible IO and standby mode 8-SOT-23-THIN -40 to 125"
U201: library part CMP-0323-00127-3, "Buck Step Down Regulator with 3 to 17 V Input and 3.3 V Output, -40 to 85 degC, 16-Pin QFN (RGT), Green (RoHS & no Sb/Br)", Manufacturer="Texas Instruments", Rating=Catalog, Switch Current Limit(Typ)(A)=3, Code_JEDEC=MO-220, ComponentLink1Description=Datasheet, ComponentLink1URL=http://www.ti.com/general/docs/lit/getliterature.tsp?genericPartNumber=TPS62142&fileType=pdf, ComponentLink2Description="Package Specification", ComponentLink2URL=http://www.ti.com/litv/pdf/mpqf119g, ComponentLink3Description="URL Link1", ComponentLink3URL="Samples URL:http://www.ti.com/product/tps54611#samples", DatasheetVersion=SLVSAJ0, Duty Cycle(Max)(%)=100, Eco-Plan="Green (RoHS & no Sb/Br)", Iout(Max)(A)=2, Iq(Typ)(mA)=0.017, Mounting Technology="Surface Mount", PackageDescription="16-Pin Plastic Quad Flat No-Lead, 3 x 3 mm Body, 0.5 mm Pitch, 1.7 x 1.7 mm Exposed Pad", PackageReference=RGT0016C, PackageVersion="revH, Oct-2011", PartNumber=TPS62142RGTT, Preset Vout(V)=3.3, Regulated Outputs(#)=1, SubFamily="Step-Down Regulator", Synchronous Rectification=TRUE, Topology=Buck, Vin(Max)(V)=17, Vin(Min)(V)=3, Vout(Max)(V)=3.3, Vout(Min)(V)=3.3

## Free pads (board coordinates)
  round 0 hole 129.92: 1(1980,3380) 1(4000,2430) 1(4000,3380)
  round 62.99 hole 43.31: 2(4080,2940)
  rect 60x100 smd: 3(2500,2370)

## Via types
v1: diameter 30, hole 14, Top Layer to Bottom Layer, 117 vias
v2: diameter 19.68, hole 11.81, Top Layer to Bottom Layer, 5 vias

## Nets (pads, with @x,y where several pads share a name; then routed paths per layer and width w, separated by ;. In a path a pad name is that pad's centre, name@x,y a point inside that pad or via, vN(x,y) a via of type N, cw(c..) or ccw(c..) an arc to the next point about the centre after c; other vN are vias at no path point)
1stDrogue: R34.1 U1.10 | length 592.1
  Top Layer w10: R34.1 2511.31,3028.38 2531.62,3028.38 2590,2970 2870,2970 2922.52,2917.48 U1.10
1stMain: R40.1 U1.12 | length 629.5
  Top Layer w10: R40.1 2539.68,2650 2639.68,2750 2830,2750 2930,2850 U1.12@3056.38,2850
2ndDrogue: R37.1 U1.11 | length 610.1
  Top Layer w10: R37.1 2511.31,2841.62 2521.62,2841.62 2620,2940 2840,2940 2895.98,2884.02 U1.11
2ndMain: pad.3 R43.1 U1.13 | length 863.6
  Top Layer w10: pad.3 2509.68,2379.68 R43.1 2579.68,2460 2639.68,2520 2780,2520 2870,2610 2870,2740 2947.09,2817.09 U1.13
+3V3: C11.2 C12.2 C14.1 C15.1 C16.2 C33.2 L201.2 R6.1 R31.2 R100.1 R101.1 R104.1 R105.1 R106.1 R107.1 R108.1 R109.1 R110.1 R111.1 R112.1 R113.1 R114.1 SD1.4 U1.3 U2.1 U2.10 U3.5 U3.8 U4.3 U4.9 U4.10 U5.3 U5.5 U201.7 U201.14 | length 2409
  Top Layer w6: v1(2659.45,3193.37) 2696.08,3230 2801.73,3230 2824.02,3207.72 R31.2 ; v1(3660,2900) 3666.49,2900 3676.18,2890.32 R108.1 ; R105.1 v1(3690,3069.33) 3696.49,3069.33 3706.12,3078.96 3744.84,3078.96 U2.10 3749.32,3075.66 3759.66,3075.66 3765.61,3069.7 U2.1 ; R107.1 v1(3740,2840) ; R101.1 3859.06,2980.31 U3.8@3859.06,2925.96 ; R100.1@3849.68,3230 3859.48,3220.2 3859.48,3180.52 v1(3860,3180) R106.1 ; U3.8 U3.8@3859.06,2925.96 ; U3.5 3868.49,2853.04 3926.96,2853.04 v1(3930,2850) ; v1(3965,2925) 3927.24,2925 3923.71,2928.52 3923.71,2929.85 3862.95,2929.85 U3.8@3859.06,2925.96 ; U4.3 3995.16,3130.16 4014.84,3149.84 U4.9 U4.10 4050.49,3185 v1(4085,3185) C14.1
  Top Layer w10: R6.1 v1(2750,3470) ; U1.3 3088.27,3151.73 v1(3110,3130) ; C15.1@3689.45,2670.55 3702.8,2657.2 U5.3 3762.8,2657.2 3788.39,2631.61 U5.5 3852.99,2631.61 3870.78,2613.83 3886.17,2613.83 v1(3890,2610) ; R104.1@3820,3422.28 R104.1 3820,3385.41 3830,3375.41 v1(3830,3370)
  Top Layer w15: R114.1@3380,2580.63 R113.1 R111.1@3530,2580.63 ; v1(3550.3,2520.3) 3530,2540.6 R111.1 R111.1@3530,2580.63 ; R109.1@3610,2580.63 R110.1 R111.1@3530,2580.63
  Bottom Layer w10: v1(2659.45,3193.37) 2659.45,3194.37 2680.16,3215.09 U201.7 ; v1@2660.8,3193.37 2660.8,3191.45 2692.25,3160 2840,3160 2898.97,3218.97 ; U201.14 2680.08,3355.2 2680.08,3379.92 2669.29,3390.71 2669.29,3449.29 2686.17,3466.17 2746.17,3466.17 v1(2750,3470) 2814.52,3470 C33.2@2872.06,3412.46 ; L201.2@2895,3299 2909.88,3313.88 L201.2 L201.2@2909.88,3333.37
  Bottom Layer w25: C33.2@2872.06,3412.46 2872.06,3410.5 C33.2 ; C33.2@2872.56,3408.04 2873.06,3407.54 2877.46,3407.54 2900.28,3384.72 2900.28,3342.97 L201.2@2909.88,3333.37
+5: J101.1
+Batt: C31.2 C35.2 C36.2 J201.1 Q1.2 Q2.2 Q3.2 Q4.2 R33.1 R36.1 R39.1 R42.1 U201.10 U201.11 U201.12 U201.13 | length 866.1
  Top Layer w10: R42.1 v1(2280,2570) ; R39.1 v1(2280,2760) ; R36.1 v1(2280,2950) ; R33.1 v1(2280,3140) ; C31.2 v1(2505,3340)
  Top Layer w25: C36.2@2727.05,2660 C36.2 v1(2732.95,2660)
  Top Layer w30: v1(2275.16,3420) J201.1 v1(2435.16,3420) ; v1(2630,2660) C36.2@2727.05,2660 ; v1(2630,3095) v1(2830,3095) C35.2@2730,3095 ; v1(2732.95,2660) v1(2830,2660)
  other v1: 2730,3097.95
Boot: U1.4 | length 64.2
  Top Layer w6: v1(3000,3140) 3021.73,3118.27 U1.4
CANH: J207.2 R0x0.2 U5.7 | length 257.7
  Top Layer w10: U5.7@3841.18,2682.8 3942.8,2682.8 J207.2
  Bottom Layer w10: J207.2 4045.6,2730 4068.04,2707.56 R0x0.2
CANL: J207.1 R0x0.1 U5.6 | length 249.4
  Top Layer w10: U5.6@3841.18,2657.2 3962.8,2657.2 J207.1
  Bottom Layer w10: J207.1 4045.6,2630 4068.04,2652.44 R0x0.1
CANRXLED: R3.1 U1.8 | length 308.9
  Top Layer w6: R3.1 2878.16,3161.84 2878.16,3081.84 2975.59,2984.41 U1.8
CANTXLED: R2.1 U1.6 | length 241.8
  Top Layer w6: R2.1 2910,3090 2948.66,3051.34 U1.6
GND: C11.1 C12.1 C13.2 C14.2 C15.2 C16.1 C31.1 C32.1 C33.1 C34.1 C35.1 C36.1 CAN_RX.2 CAN_TX.2 J101.5 J101.6 J101.7 J101.8 J101.9 J101.10 J101.11 J201.2 J203.2 J204.2 J205.2 J206.2 pad.2 PWR.2 Q5.2 Q6.2 Q7.2 Q8.2 R35.2 R38.2 R41.2 R44.2 SD1.6 SD1.9 SD1.10 SD1.11 SD1.12 SD_RX.2 SD_TX.2 Status.2 SW1.3 SW1.4 SW1.5 U1.1 U1.2 U1.42 U1.43 U1.46 U1.47 U1.48 U1.49 U1.50 U1.51 U1.52 U1.53 U1.54 U1.55 U1.56 U1.57 U1.58 U1.59 U1.60 U1.61 U1.61_1 U1.61_2 U1.61_3 U1.61_4 U1.61_5 U1.61_6 U1.61_7 U1.61_8 U1.62 U1.63 U1.64 U1.65 U2.5 U2.8 U2.9 U3.1 U3.2 U3.3 U3.6 U3.7 U4.6 U4.8 U5.2 U5.8 U201.5 U201.6 U201.8 U201.15 U201.16 U201.17@2690,3300 | length 5293.6
  Top Layer w6: U1.42 3607.24,3119.13 3689.13,3119.13 v1(3690,3120) 3690.54,3119.46 3744.89,3119.46 U2.8 U2.9 ; SW1.4 3700,3280.79 v1(3700,3350) ; SW1.3 3700,3419.21 v1(3700,3350) ; SW1.5 v1(3700,3350) ; U3.1 U3.2 U3.3 3839.37,2858.11 3853.14,2871.88 3861.56,2871.88 U3.6 U3.7 3919.19,2895.45 3919.19,2894.67 3927.24,2886.62 3951.88,2886.62 3958.51,2880 v1(3965,2880) ; U2.5@3801.58,3115.03 U2.5 3805.96,3118.92 3809.85,3122.81 3809.85,3123.3 3815.36,3128.81 3815.36,3179.64 v1(3815,3180) ; v1(4055,3050) C13.2 4022.72,3072.28 4014.84,3080.16 U4.6 4018.73,3113.87 4018.73,3122.75 4022.25,3126.27 4031.13,3126.27 4032.53,3127.67 4077.76,3127.67 4085,3120.43 C14.2 v1(4085,3085)
  Top Layer w10: v1(2207.66,2400) v1@2213.07,2400 ; v1(2210.16,2630) v1@2215.57,2630 ; v1(2210.16,3090) v1@2210.57,3090 ; Q8.2 2416.42,2517.4 2423.23,2524.21 2423.23,2527.17 2446.06,2550 v1(2470,2550) 2501.89,2518.11 2501.89,2507.8 R44.2 R44.2@2509.84,2500 ; Q7.2 2416.42,2707.4 2423.23,2714.21 2423.23,2717.17 2445.34,2739.28 2469.28,2739.28 v1(2470,2740) 2501.89,2708.11 2501.89,2697.8 R41.2 ; Q6.2 2416.42,2897.4 2423.23,2904.21 2423.23,2907.17 2446.06,2930 v1(2470,2930) 2501.89,2898.11 2501.89,2887.8 R38.2 ; Q5.2 2416.42,3087.4 2423.23,3094.21 2423.23,3097.17 2446.06,3120 v1(2470,3120) 2501.89,3088.11 2501.89,3077.8 R35.2 ; C31.1 2505,3220.1 2520,3205.1 v1(2520,3205) ; PWR.2@2570,3430 2570,3260.47 CAN_RX.2 ; PWR.2@2570,3440 v1(2570.47,3440) ; SD_TX.2 SD_RX.2 2989.53,2684.12 3000,2694.59 v1(3000,2700) 3005.41,2700 3014.23,2708.82 U1.63 ; U1.2 U1.1 U1.62 U1.60 U1.59 U1.58 U1.57 U1.56 U1.55 U1.54 U1.53 U1.52 U1.51 U1.50 U1.49 U1.48 U1.47 U1.46 U1.65 3679.21,3260 SW1.4 ; J101.8 v1(3322.76,2370) ; J101.11 v1(3519.61,2370) 3519.61,2443.9 J101.7@3493.11,2470.39 ; J101.5 3421.18,2473.27 3424.06,2470.39 J101.7 3495.97,2474.31 C16.1 ; U1.42 U1.43 ; C15.2@3680,2705.31 3685.24,2700.08 3697.19,2700.08 3713,2684.27 3727.34,2684.27 U5.2 ; C15.2@3685,2705.31 3688,2708.31 3687.5,2708.81 3687.5,2737.5 v1(3690,2740) ; SW1.5 3776.1,3333.39 3781.93,3327.56 C34.1 ; v1(3830,2760) 3830,2709.57 U5.8
  Top Layer w30: J206.2 v1(2207.66,2400) ; J204.2 v1(2210.16,2860) ; J203.2 v1(2210.16,3090) ; J205.2@2135.16,2630 v1(2210.16,2630) ; v1(2275.16,3320) J201.2 v1(2435.16,3320) ; v1(2630,2410) 2727.05,2410 C36.1 2732.95,2410 v1(2830,2410) ; v1(2630,2460) C36.1@2705,2460 ; v1(2630,2845) 2727.05,2845 C35.1 ; v1(2630,2895) 2695.79,2895 2730,2860.79 C35.1 ; C36.1@2755,2460 v1(2830,2460) ; C35.1@2755,2895 v1(2830,2895) ; v1(2830,2845) 2732.95,2845 C35.1
  Bottom Layer w6: v1(2520,3205) 2535,3190 2610.51,3190 2656.58,3236.07 2658.55,3236.07 2660.47,3237.99 U201.8 ; v1(3690,3120) 3735.35,3120 C11.1 ; v1(4055,3050) v1@4055,3056.49
  Bottom Layer w10: v1(2520,3205) v1@2520,3210.1 ; U201.6 2699.92,3244.8 2699.92,3195.08 v1(2700,3195) ; U201.15 2699.92,3355.2 2699.92,3429.92 v1(2700,3430) ; U201.5 2719.53,3238.15 2736.17,3221.5 2736.17,3198.83 v1(2740,3195) ; U201.16 2719.53,3368.45 2730,3378.92 2730,3414.59 v1@2740,3424.59 ; v1(3240,2470) 3244.44,2465.56 3248.62,2465.56 3248.62,2421.38 3262.76,2421.38 3281.35,2402.8 3281.35,2388.65 3300,2370 v1(3322.76,2370)
  Bottom Layer w25: v1(2740,3430) 2797.44,3430 2814.98,3412.46 2816.94,3412.46 2817.44,3411.96 C33.1
  other v1: 3820,2440 2860,2520 3636.14,2523.78 2530,2540 2600,2550 2680,2560 2640,2600 3610,2710 3300,2760 3360,2760 3420,2760 3480,2760 3540,2760 2530,2770 3300,2920 3360,2920 3260,2950 3400,2950 2530,2960 3330.79,2984.41 2920,2990 4017,2995.43 3000,3020 3260,3020 3400,3020 2850,3030 3300,3050 3360,3050 3000,3180 3130,3190 3210,3190 3290,3190 3370,3190 3450,3190 3530,3190 3680,3270 3880,3280 2980,3410 2930,3430 2970,3470
  other v2: 2670.32,3280.32 2709.68,3280.32 2690,3300 2670.32,3319.68 2709.68,3319.68
IMU_INT: U1.34 U3.4 | length 288.5
  Top Layer w6: U1.34 3611.25,2845.68 3624.32,2845.68 3662.58,2807.42 3851.08,2807.42 3856.89,2813.23 3856.89,2827.83 U3.4
IMU_SCL: R108.2 U1.36 U3.13 | length 214.6
  Top Layer w6: U1.36 3614.25,2917.48 3626.46,2929.69 3720.32,2929.69 3774.23,2875.77 U3.13
IMU_SDA: R107.2 U1.35 U3.14 | length 220.3
  Top Layer w6: U1.35 3607.69,2882.7 3627.61,2882.7 3660.52,2849.8 R107.2 3696.31,2866 3754,2866 3761.36,2858.64 3791.05,2858.64 U3.14
NetC13_1: C13.1 U4.5 | length 63.2
  Top Layer w6: C13.1 3987.28,3072.28 3995.16,3080.16 U4.5
NetC32_2: C32.2 U201.9 | length 72.6
  Bottom Layer w6: v1(2591.04,3219.72) 2626.73,3255.41 2626.73,3268.55 2628.65,3270.47 U201.9
NetCAN_RX_1: CAN_RX.1 R3.2 | length 261.4
  Top Layer w6: CAN_RX.1 2631.07,3258.46 2820.91,3258.46 R3.2
NetCAN_TX_1: CAN_TX.1 R2.2 | length 353
  Top Layer w6: CAN_TX.1 2664.53,3350 2770,3350 R2.2
NetJ203_1: J203.1 Q1.3 | length 150.6
  Bottom Layer w30: Q1.3@2006.65,3129.25 2010.12,3129.25 2011.61,3130.75 2011.61,3134.07 2067.54,3190 J203.1
NetJ204_1: J204.1 Q2.3 | length 144.4
  Bottom Layer w30: Q2.3@2010.51,2900.35 2070.16,2960 J204.1
NetJ205_1: J205.1 Q3.3 | length 149.8
  Top Layer w30: J205.1 J205.1@2140.16,2720
  Bottom Layer w30: Q3.3@2016.68,2676.52 2070.16,2730 J205.1
NetJ206_1: J206.1 Q4.3 | length 157.9
  Top Layer w30: J206.1 J206.1@2140.16,2490
  Bottom Layer w30: Q4.3@2012.52,2440.75 2013.58,2440.75 2013.58,2443.43 2070.16,2500 J206.1
NetL201_1: L201.1 U201.1 U201.2 U201.3
NetPWR_1: PWR.1 R6.2 | length 52.2
  Top Layer w6: PWR.1@2641.73,3437.2 2664.73,3460.2 2670.52,3460.2 R6.2
NetQ1_1: Q1.1 Q5.3 R33.2 | length 473.1
  Top Layer w10: v1(2030.16,3070) 2070.16,3030 2310,3030 Q5.3@2321.45,3041.45 ; R33.2 2313.58,3060.31 2323.9,3050 Q5.3
  Bottom Layer w10: Q1.1 1932.13,3092.6 1942.87,3081.85 1954.72,3070 v1(2030.16,3070)
NetQ2_1: Q2.1 Q6.3 R36.2 | length 496.7
  Top Layer w10: v1(2030.16,2840) 2031.59,2840 2071.59,2800 2266.85,2800 Q6.3 2316.54,2870.31 R36.2
  Bottom Layer w10: Q2.1 1934.09,2862.6 1944.84,2851.85 1944.84,2851.8 1956.64,2840 v1(2030.16,2840)
NetQ3_1: Q3.1 Q7.3 R39.2 | length 514.2
  Top Layer w10: v1(2030.16,2610) 2031.59,2610 2071.59,2570 2226.85,2570 2317.09,2660.24 2317.09,2663.19 Q7.3@2323.9,2670 ; R39.2 2313.58,2680.31 Q7.3@2323.9,2670 ; Q7.3@2323.9,2670 Q7.3 Q7.3@2323.9,2670
  Bottom Layer w10: Q3.1@1933.3,2633.49 1933.3,2633.4 1944.84,2621.85 1944.93,2621.85 1956.78,2610 v1(2030.16,2610)
NetQ4_1: Q4.1 Q8.3 R42.2 | length 541.5
  Top Layer w10: v1(2030.16,2380) 2031.59,2380 2071.59,2340 2210,2340 2317.09,2447.09 2317.09,2470.24 2317.09,2473.19 Q8.3@2323.9,2480 ; R42.2 2313.58,2490.31 Q8.3@2323.9,2480 ; Q8.3 Q8.3@2323.9,2480
  Bottom Layer w10: Q4.1@1933.11,2403.58 1956.69,2380 v1(2030.16,2380)
NetQ5_1: Q5.1 R34.2 R35.1 | length 99.6
  Top Layer w10: Q5.1 2443.23,3012.6 2461.69,3031.06 2461.69,3031.22 2470.47,3040 2471.46,3040 2470.96,3040.49 R35.1@2470.96,3070
NetQ6_1: Q6.1 R37.2 R38.1 | length 99.8
  Top Layer w10: Q6.1 2443.23,2822.6 2461.69,2841.06 2461.69,2841.22 2470.47,2850 2471.46,2850 2470.96,2850.49 2470.96,2879.51 R38.1@2470.47,2880
NetQ7_1: Q7.1 R40.2 R41.1 | length 99.8
  Top Layer w10: Q7.1 2443.23,2632.6 2461.69,2651.06 2461.69,2651.22 2470.47,2660 2471.46,2660 2470.96,2660.49 2470.96,2689.51 R41.1@2470.47,2690
NetQ8_1: Q8.1 R43.2 R44.1 | length 98.7
  Top Layer w10: Q8.1 2443.23,2442.6 2461.69,2461.06 2461.69,2461.22 2470.96,2470.49 R44.1@2470.96,2500
NetR1_2: R1.2 Status.1 | length 391
  Top Layer w6: Status.1@2629.53,3380 2779.69,3380 R1.2
NetR4_2: R4.2 SD_TX.1 | length 147.4
  Top Layer w6: R4.2 2900,2680.31 2900,2600 2909.25,2590.75 2919.72,2590.75 SD_TX.1@2930.47,2580
NetR5_2: R5.2 SD_RX.1 | length 72.5
  Top Layer w6: SD_RX.1 2955.36,2664.89 R5.2@2955.36,2695.68
  Top Layer w10: R5.2@2955.36,2695.68 R5.2
NetR31_1: R31.1 U201.4 | length 138.6
  Top Layer w6: v1(2785,3195) 2807.72,3172.28 R31.1
  Bottom Layer w6: U201.4@2751.85,3270.47 2785,3237.32 v1(2785,3195)
NetR100_2: R100.2 U2.6 | length 108.5
  Top Layer w6: U2.6 3782.46,3132.08 3782.46,3197.15 R100.2
NetR101_2: R101.2 U3.12 | length 119.6
  Top Layer w6: U3.12 3789.17,2895.45 3785.28,2899.34 3785.28,2900.17 3774.65,2910.8 3774.65,2954.65 R101.2
NetR104_2: R104.2 SW1.1 | length 80.8
  Top Layer w10: SW1.1 3753.46,3430.71 3766.18,3443.43 3766.18,3445.39 3778.5,3457.72 R104.2@3820,3457.72
Press_INT: U1.44 U2.7 | length 182.7
  Top Layer w6: U1.44 3709.67,3185.2 3761.23,3133.63 3761.72,3133.63 3765.61,3129.74 U2.7
Press_SCL: R105.2 U1.38 U2.2 U4.1 | length 530.1
  Top Layer w6: U1.38 3714.41,2984.41 3736.94,3006.94 v1(3736.94,3012) 3742,3012 3781.41,3051.41 3781.41,3065.32 U2.2 ; v1(3915,3125) 3959.53,3169.53 U4.1
  Bottom Layer w6: v1(3736.94,3012) 3738.94,3010 3800,3010 v1(3915,3125)
Press_SDA: R106.2 U1.37 U2.4 U4.4 | length 492.4
  Top Layer w6: U1.37 3720.63,2950.94 R106.2 ; U2.4@3805.96,3099.23 3808.72,3096.48 3853.84,3096.48 R106.2 ; U4.4 3974.49,3110.47 3954.33,3090.31 R106.2
PWM1: J208.1 U1.16 | length 322.9
  Top Layer w10: J208.1 2990,2510 3096.54,2616.54 U1.16
PWM2: J208.2 U1.17 | length 295.4
  Top Layer w10: J208.2 3090,2540 3130,2580 U1.17
Reset: C34.2 SW1.2 U1.45 | length 245.9
  Top Layer w6: U1.45 3698.9,3218.66 SW1.2@3749.53,3269.29 ; SW1.2@3754.65,3272.44 C34.2
  Top Layer w10: SW1.2@3749.53,3269.29 SW1.2 SW1.2@3754.65,3272.44
SD_CLK: R111.2 SD1.5 U1.29 | length 274.7
  Top Layer w6: R111.2 3530,2643.51 3520,2653.51 v1(3520,2660) 3520,2666.49 3531.57,2678.07 U1.29
  Bottom Layer w6: v1@3512.73,2667.27 3592.83,2587.17 SD1.5
SD_CMD: R112.2 SD1.3 U1.27 | length 235.9
  Top Layer w6: R112.2 3460,2643.51 3470,2653.51 3470,2666.49 3464.65,2671.85 U1.27
  Bottom Layer w6: v1@3468.01,2660.74 3500,2628.74 SD1.3@3500,2533.62
  other v1: 3470,2660
SD_DAT0: R110.2 SD1.7 U1.30 | length 250.3
  Top Layer w6: 3565.04,2675.04 U1.30 U1.30@3565.04,2710.54 ; R110.2 v1(3570,2660)
  Bottom Layer w6: v1(3570,2660) 3677.11,2552.89 3677.11,2532.89 SD1.7@3679.46,2530.54
SD_DAT1: R109.2 SD1.8 U1.31 | length 342.6
  Top Layer w6: U1.31 3611.25,2745.28 3623.15,2745.28 3640,2728.43 3640,2680 v1(3620,2660) 3620,2653.51 3610,2643.51 R109.2
  Bottom Layer w6: v1(3620,2660) 3710,2570 3710,2547.92 3710.01,2536.53 SD1.8
SD_DAT2: R114.2 SD1.1 U1.25 | length 272.7
  Top Layer w6: R114.2 3380,2643.51 3370,2653.51 v1(3370,2660) 3397.72,2687.72 U1.25
  Bottom Layer w6: v1(3370,2660) 3420,2610 3420,2546.61 cw(c3400,2530) 3421.65,2544.4 3420.55,2523.73 SD1.1@3420,2513.39
SD_DAT3: R113.2 SD1.2 U1.26 | length 259.1
  Top Layer w6: R113.2 v1(3420,2660) 3431.18,2671.18 U1.26
  Bottom Layer w6: v1@3418.51,2661.49 v1(3420,2660) 3462.91,2617.09 SD1.2 SD1.2@3462.91,2514.27
SDRXLED: R5.1 U1.15 | length 99.5
  Top Layer w6: R5.1 2970.47,2750.16 U1.15
SDTXLED: R4.1 U1.14 | length 153.4
  Top Layer w6: R4.1 2963.94,2783.62 U1.14
StatusLED: R1.1 U1.5 | length 194.5
  Top Layer w6: R1.1 2941.73,3162.04 2941.73,3098.27 2955.2,3084.8 U1.5
TWAI_RX: U1.32 U5.4 | length 253.6
  Top Layer w6: U1.32@3605.3,2780 3630,2780 3660,2750 3660,2650 3678.39,2631.61 U5.4@3738.82,2631.61
TWAI_TX: U1.33 U5.1 | length 186.7
  Top Layer w6: U1.33 3610.29,2813.18 3626.82,2813.18 3656.38,2783.62 3686.38,2783.62 3728.82,2741.18 U5.1
USB_D_N: J101.2 U1.23 | length 220.7
  Top Layer w6: U1.23@3335.09,2697.82 3335.09,2682.82 3320,2667.73 3320,2540 3349.07,2510.93 J101.2@3349.07,2495.38
USB_D_P: J101.3 U1.24 | length 237
  Top Layer w6: U1.24 3351.75,2696.32 3351.75,2678.52 3336.55,2663.32 3336.55,2544.97 3365.62,2515.9 J101.3@3365.62,2495.38
pads on no net: J101.4 U1.7 U1.9 U1.18 U1.19 U1.20 U1.21 U1.22 U1.28 U1.39 U1.40 U1.41 U2.3 U3.9 U3.10 U3.11 U4.2 U4.7 U4.11 U4.12 U201.17@2690,3300

## Polygon pours and split planes (outlines as drawn)
+3V3 on Bottom Layer "+3V3_L04_P016" (solid, pour order 16): 2950,3500 2950,2310 4120,2310 4120,3500
+Batt on Bottom Layer "+BATT_L04_P015" (solid, pour order 15): 1860,2310 2920,2310 2920,3120 2900,3140 2580,3140 2560,3160 2560,3500 1860,3500
+Batt on Bottom Layer "+BATT_L04_P011" (solid, pour order 11): 2634.88,3329.53 2660.47,3355.12 2660.47,3377.34 2654.45,3383.37 2519.45,3383.37 2514.45,3378.37 2514.45,3293.37 2519.45,3288.37 2633.09,3288.37 2634.88,3290.16
NetL201_1 on Bottom Layer "NETL201_1_L04_P013" (solid, pour order 13): 2745.12,3290.16 2746.91,3288.37 2824.45,3288.37 2829.45,3293.37 2829.45,3355.55 2820.8,3364.2 2754.2,3364.2 2744.6,3354.6
+3V3 on Bottom Layer "+3V3_L04_P012" (solid, pour order 12): 2955.61,3150 2955.61,3390 2950,3390 2890,3330 2890,3210 2950,3150
GND on GND 1 "GND_L02_P010" (solid, pour order 10): 4120,2310 4120,3500 1860,3500 1860,2310
GND on GND 2 "GND_L03_P014" (solid, pour order 14): 1860,3500 4120,3500 4120,2310 1860,2310

## Keep-outs
Keep-Out Layer:
  circle w40: c1980,3380 r100
  circle w40: c4000,3380 r100
  circle w40: c4000,2430 r100

## Silkscreen, mask and mechanical layers (free items; w line width, h text height)
Top Overlay:
  text "+ -" at 2165.16,3450 h60 r270
  text "Batt" at 2111.16,3434 h40 r270
  text "+ -" at 1940,3220 h60 r270
  text "Apo1" at 1889.33,3204 h40 r270
  text "B" at 3014,3076 h40 r90
  text "+ -" at 1940.16,2990 h60 r270
  text "Apo2" at 1889.49,2984 h40 r270
  text "CAN" at 3986,2806 h40
  text "Main1" at 1886.16,2764 h40 r270
  text "+ -" at 1940.16,2760 h60 r270
  text "Main2" at 1886.16,2544 h40 r270
  text "+ -" at 1940.16,2530 h60 r270
Bottom Overlay:
  text "H L" at 3940,2760 h60 r90
  text "PWM" at 3094,2326 h40
Mechanical 13:
  the board outline again, w4

## Text inside footprints (layer, text, board x,y; h text height)
J101: Mechanical 1 "PCB Edge" at 2850,2340 h39.37